# EAGLE board Piano (EAGLE 8.5.0)
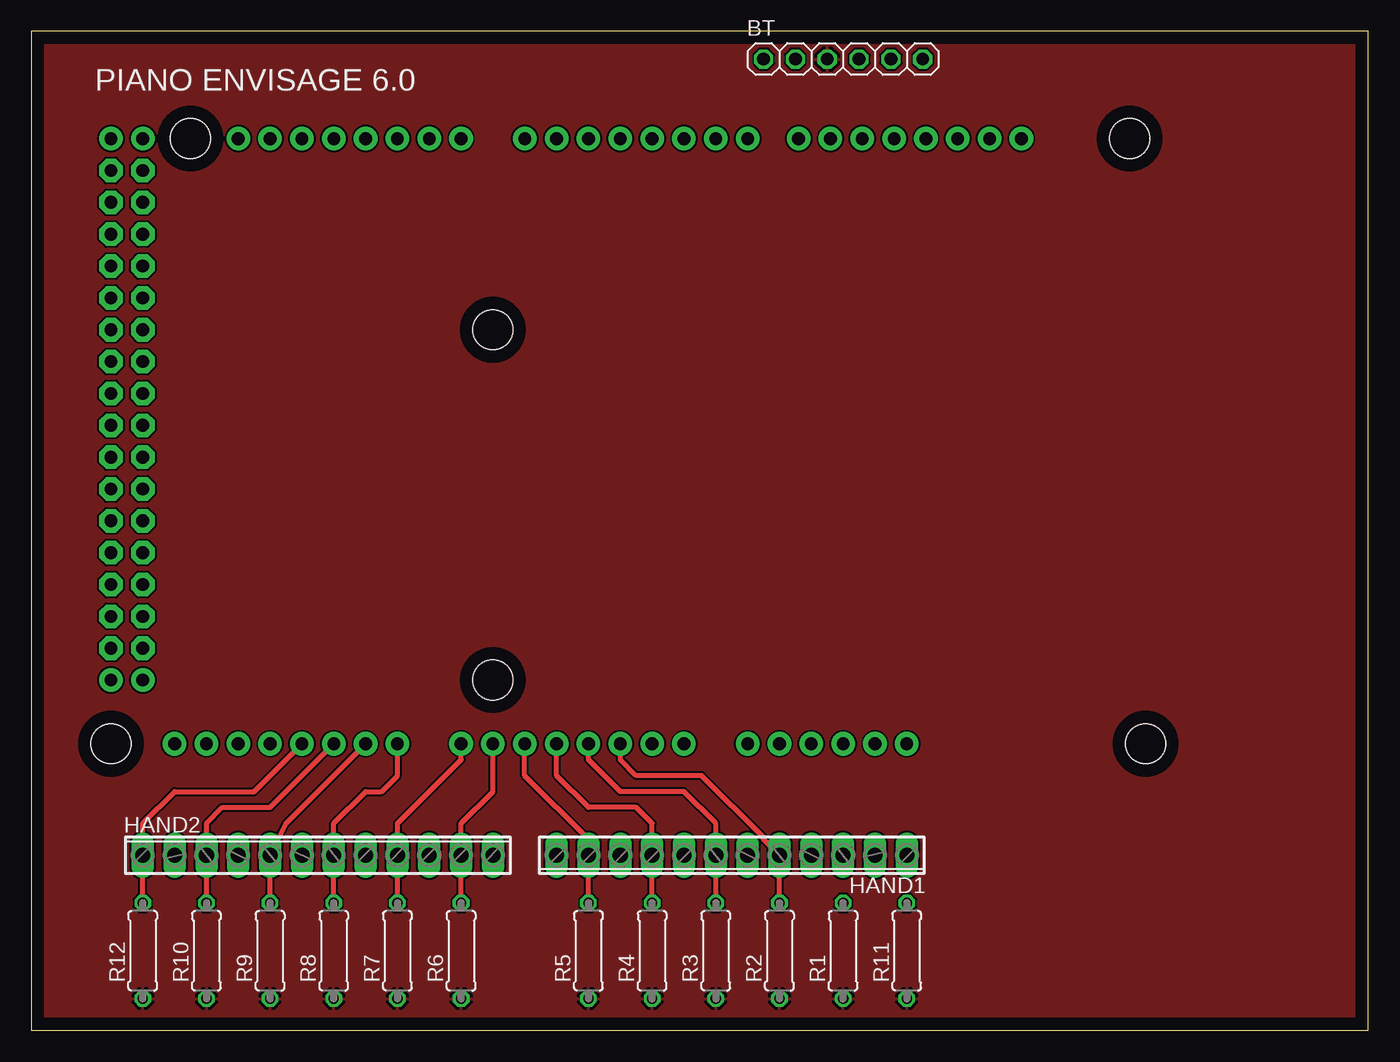
[diagram p0: board, top side]
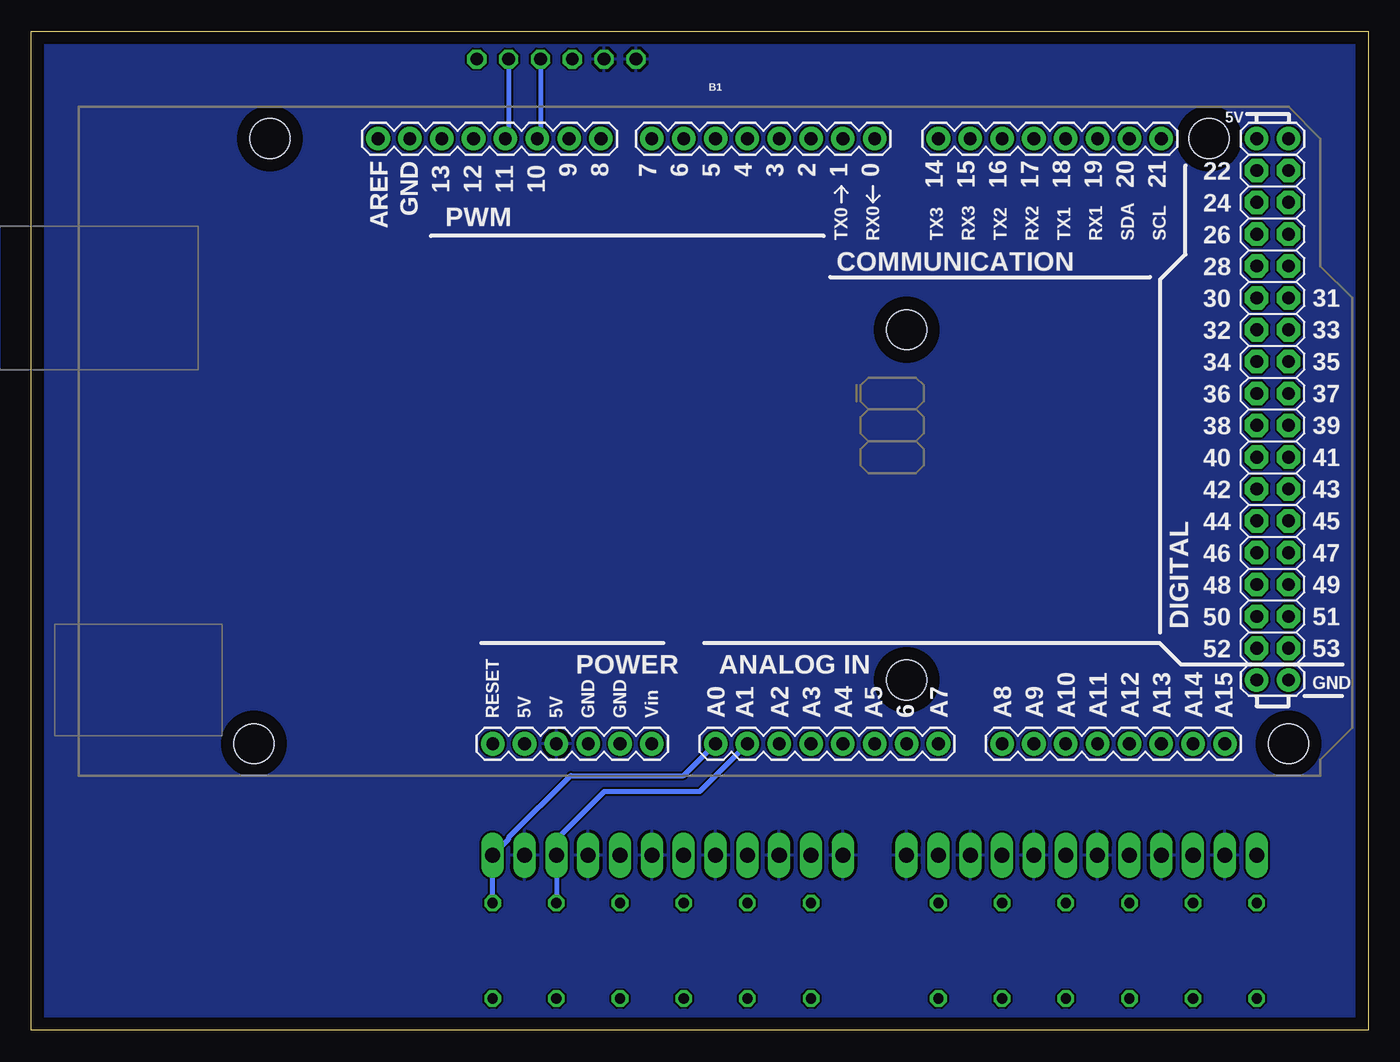
[diagram p1: board, bottom side, seen from below]

Size 106.66 x 79.68 mm. Coordinates in mm from the lower left corner, seen from the top.
Outline: 0,0 106.66,0 106.66,79.68 0,79.68 0,0
Copper layers (1*16): Top 0.035mm / dielectric 1.5mm / Bottom 0.035mm
Design rules "default": minimum track width 6mil, minimum drill 0.35mm, track to track 6mil, track to pad 6mil, pad to pad 6mil, via to via 6mil, smd to smd 6mil, copper to edge 40mil, drill to drill 6mil, minimum pad ring 10mil, minimum via ring 8mil, stop-mask expansion 4mil, vias tented up to drill 0mil, thermal gap 10mil

## Footprints (pad centres in the part's own frame; a part is rotated, then mirrored left to right if it is on the bottom)
ARDUINO_MEGA = drill 1.016 pad 1.88: 0 13.97,24.13; 1 11.43,24.13; 2 8.89,24.13; 3 6.35,24.13; 3.3V -13.97,-24.13; 4 3.81,24.13; 5 1.27,24.13; 5V@0 -11.43,-24.13; 5V@1 44.45,24.13; 5V@2 46.99,24.13; 6 -1.27,24.13; 7 -3.81,24.13; 8 -7.874,24.13; 9 -10.414,24.13; 10 -12.954,24.13; 11 -15.494,24.13; 12 -18.034,24.13; 13 -20.574,24.13; 14 19.05,24.13; 15 21.59,24.13; 16 24.13,24.13; 17 26.67,24.13; 18 29.21,24.13; 19 31.75,24.13; 20 34.29,24.13; 21 36.83,24.13; A0 1.27,-24.13; A1 3.81,-24.13; A2 6.35,-24.13; A3 8.89,-24.13; A4 11.43,-24.13; A5 13.97,-24.13; A6 16.51,-24.13; A7 19.05,-24.13; A8 24.13,-24.13; A9 26.67,-24.13; A10 29.21,-24.13; A11 31.75,-24.13; A12 34.29,-24.13; A13 36.83,-24.13; A14 39.37,-24.13; A15 41.91,-24.13; AREF -25.654,24.13; GND@0 -8.89,-24.13; GND@1 -6.35,-24.13; GND@2 44.45,-19.05; GND@3 46.99,-19.05; GND@4 -23.114,24.13; RESET -16.51,-24.13; VIN -3.81,-24.13 | drill 1.016 pad 1.88 octagon: 22 44.45,21.59; 23 46.99,21.59; 24 44.45,19.05; 25 46.99,19.05; 26 44.45,16.51; 27 46.99,16.51; 28 44.45,13.97; 29 46.99,13.97; 30 44.45,11.43; 31 46.99,11.43; 32 44.45,8.89; 33 46.99,8.89; 34 44.45,6.35; 35 46.99,6.35; 36 44.45,3.81; 37 46.99,3.81; 38 44.45,1.27; 39 46.99,1.27; 40 44.45,-1.27; 41 46.99,-1.27; 42 44.45,-3.81; 43 46.99,-3.81; 44 44.45,-6.35; 45 46.99,-6.35; 46 44.45,-8.89; 47 46.99,-8.89; 48 44.45,-11.43; 49 46.99,-11.43; 50 44.45,-13.97; 51 46.99,-13.97; 52 44.45,-16.51; 53 46.99,-16.51 | hole 3.2: -34.29,24.13; -35.56,-24.13; 16.51,8.89; 16.51,-19.05; 40.64,24.13; 46.99,-24.13
1X06 = drill 1.016 octagon: 1 -6.35,0; 2 -3.81,0; 3 -1.27,0; 4 1.27,0; 5 3.81,0; 6 6.35,0
12POL254 = drill 1.2 long: 1 -13.97,0; 2 -11.43,0; 3 -8.89,0; 4 -6.35,0; 5 -3.81,0; 6 -1.27,0; 7 1.27,0; 8 3.81,0; 9 6.35,0; 10 8.89,0; 11 11.43,0; 12 13.97,0
0207/7 = drill 0.813 octagon: 1 -3.81,0; 2 3.81,0

## Placement (x,y rotation side)
B1  ARDUINO_MEGA_R3FULL  [ARDUINO_MEGA]  53.34,46.99 0 bottom
BT  [1X06]  64.77,77.47 0 top
HAND1  [12POL254]  55.88,13.97 180 top
HAND2  [12POL254]  22.86,13.97 0 top
R1  [0207/7]  64.77,6.35 90 top
R2  [0207/7]  59.69,6.35 90 top
R3  [0207/7]  54.61,6.35 90 top
R4  [0207/7]  49.53,6.35 90 top
R5  [0207/7]  44.45,6.35 90 top
R6  [0207/7]  34.29,6.35 90 top
R7  [0207/7]  29.21,6.35 90 top
R8  [0207/7]  24.13,6.35 90 top
R9  [0207/7]  19.05,6.35 90 top
R10  [0207/7]  13.97,6.35 90 top
R11  [0207/7]  69.85,6.35 90 top
R12  [0207/7]  8.89,6.35 90 top

## Library data of the parts
B1 = SparkfunBoards
BT R1-R12 = adafruit
HAND1 HAND2 = con-phoenix-254; OC_FARNELL: unknown; OC_NEWARK: unknown

## Nets
5V: B1.5V@0 BT.1 BT.2 HAND1.2 HAND1.4 HAND1.6 HAND1.8 HAND1.10 HAND1.12 HAND2.2 HAND2.4 HAND2.6 HAND2.8 HAND2.10 HAND2.12
GND: BT.3 R1.1 R2.1 R3.1 R4.1 R5.1 R6.1 R7.1 R8.1 R9.1 R10.1 R11.1 R12.1
N$1: B1.A1 HAND1.3 R1.2
N$2: B1.A2 HAND1.5 R2.2
N$3: B1.A3 HAND1.7 R3.2
N$4: B1.A4 HAND1.9 R4.2
N$5: B1.A5 HAND1.11 R5.2
N$6: B1.A6 HAND2.11 R6.2
N$7: B1.A7 HAND2.9 R7.2
N$8: B1.A8 HAND2.7 R8.2
N$9: B1.A9 HAND2.5 R9.2
N$10: B1.A10 HAND2.3 R10.2
N$11: B1.A0 HAND1.1 R11.2
N$12: B1.A11 HAND2.1 R12.2
N$18: B1.10 BT.4
N$19: B1.11 BT.5

## Tracks (layer width: path | path; a pad name or v marks a point on that pad's centre or on a via)
5V
  pour Bottom: -5.08,85.09 -8.89,85.09 -8.89,-6.35 113.03,-6.35 114.3,-5.08 114.3,83.82 113.03,85.09
GND
  pour Top: -1.27,81.28 -1.27,-1.27 109.22,-1.27 109.22,81.28
N$1
  Bottom 0.406: B1.A1 53.34,19.05 60.96,19.05 64.77,15.24 HAND1.3 R1.2
N$2
  Top 0.406: R2.2 HAND1.5 58.41,15.25 58.41,15.39 53.48,20.32 48.26,20.32 46.99,21.59 B1.A2
N$3
  Top 0.406: R3.2 HAND1.7 54.61,16.51 52.07,19.05 46.99,19.05 44.45,21.59 B1.A3
N$4
  Top 0.406: R4.2 HAND1.9 49.53,16.51 48.26,17.78 44.45,17.78 41.91,20.32 B1.A4
N$5
  Top 0.406: R5.2 HAND1.11 44.45,15.24 39.37,20.32 B1.A5
N$6
  Top 0.406: R6.2 HAND2.11 34.29,16.51 36.83,19.05 B1.A6
N$7
  Top 0.406: R7.2 HAND2.9 29.21,16.51 34.29,21.59 B1.A7
N$8
  Top 0.406: R8.2 HAND2.7 24.13,16.51 26.67,19.05 27.94,19.05 29.21,20.32 B1.A8
N$9
  Top 0.406: R9.2 HAND2.5 20.32,16.51 B1.A9
N$10
  Top 0.406: R10.2 HAND2.3 13.97,16.51 15.24,17.78 19.05,17.78 B1.A10
N$11
  Bottom 0.406: R11.2 HAND1.1 68.57,15.25 68.57,15.39 63.64,20.32 54.61,20.32 B1.A0
N$12
  Top 0.406: R12.2 HAND2.1 8.89,16.51 11.43,19.05 17.78,19.05 B1.A11
N$18
  Bottom 0.406: B1.10 66.04,71.37 BT.4
N$19
  Bottom 0.406: BT.5 68.58,71.37 B1.11

## Text on the board
tNames: PIANO ENVISAGE 6.0